# Altium PCB DAP-Link.PcbDoc
Units mil, origin at the board's own origin, x right, y up, seen from the top; angles counter-clockwise.
Board outline 1137.8 x 500 mil, 4 copper layers (Top Layer, Int1 (GND), Int2 (PWR), Bottom Layer), stack 62.449 mil thick; 37 components, 29 nets, 146 pads, 51 vias.
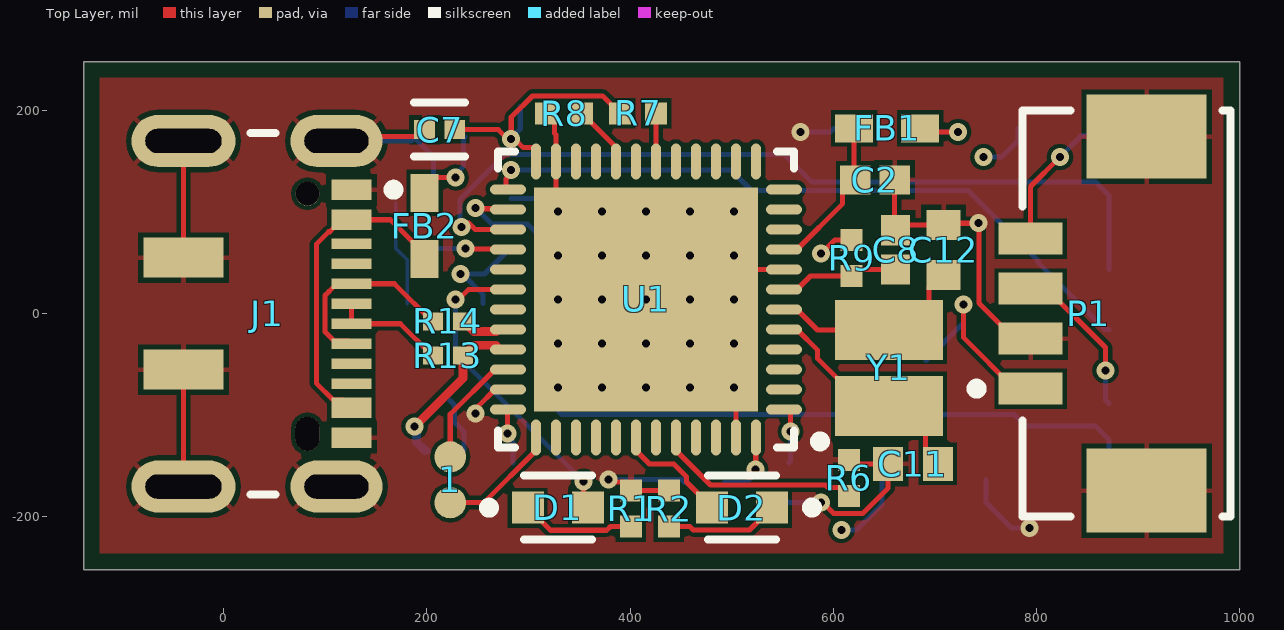
[diagram p0: Top Layer view]
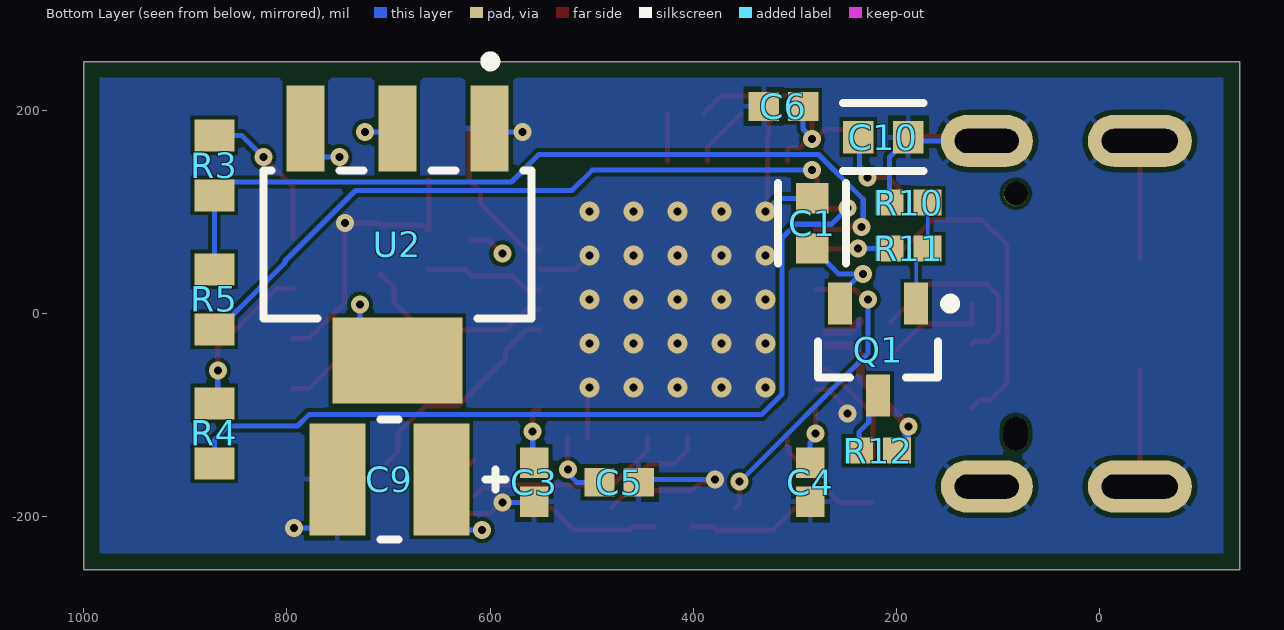
[diagram p1: Bottom Layer view, seen from below]
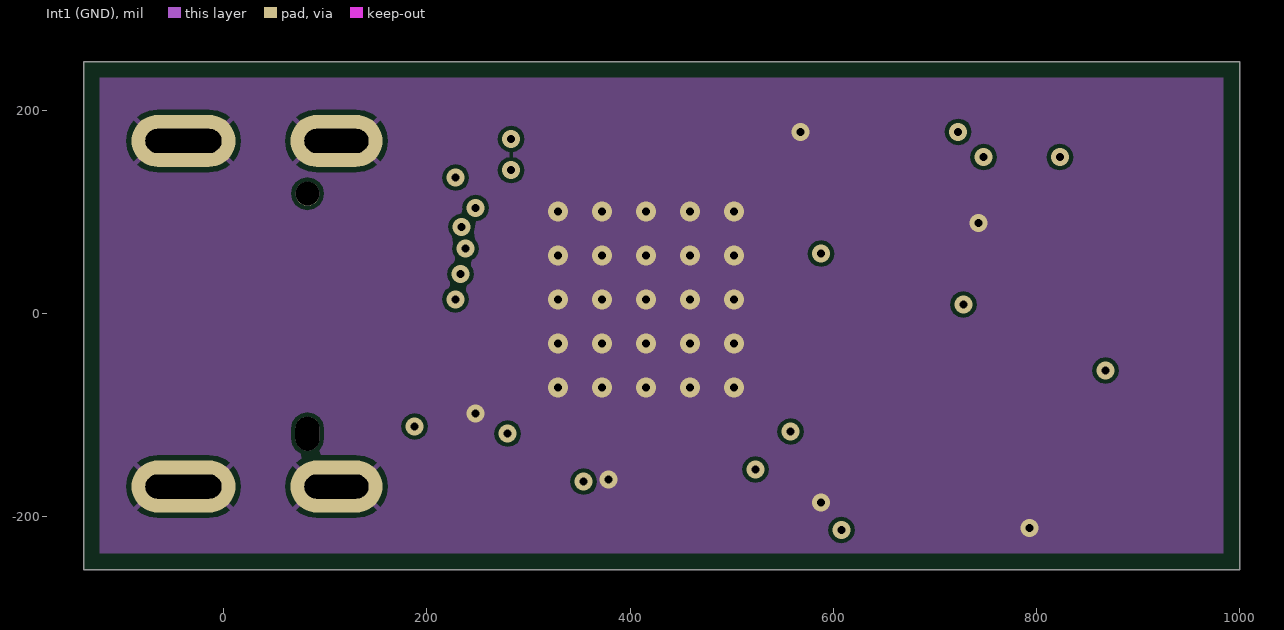
[diagram p2: Int1 (GND)]
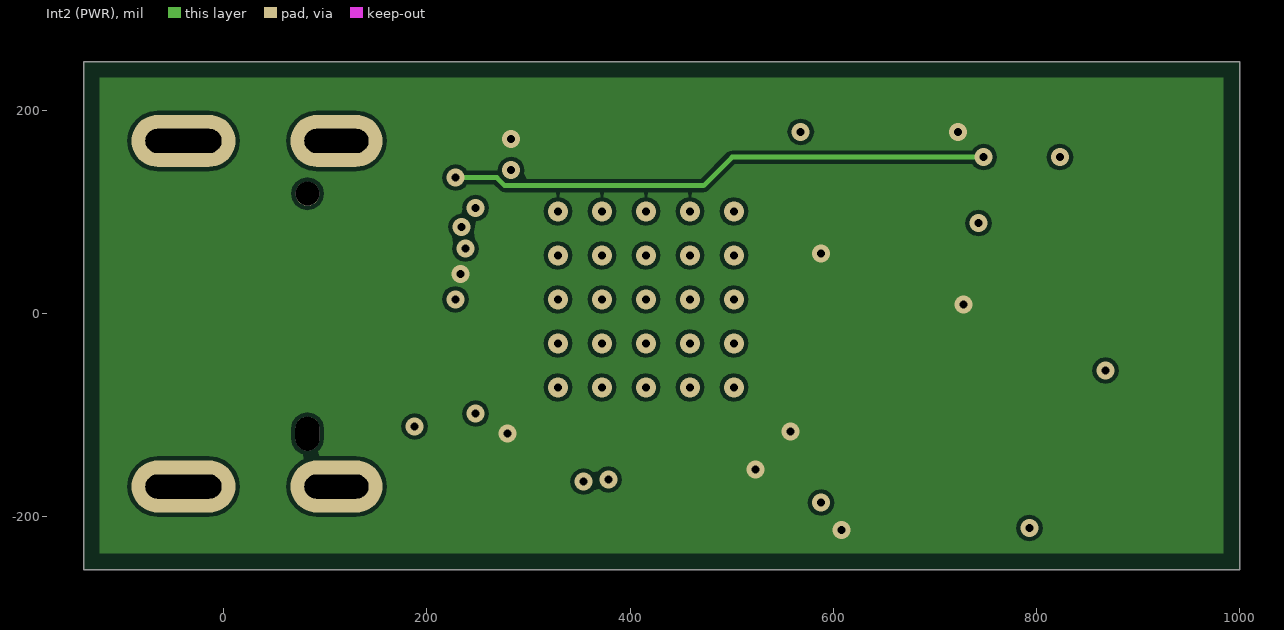
[diagram p3: Int2 (PWR)]

## Layer stack, top to bottom
Top Solder: solder mask 0.6, SM-001, Dk 3.8
Top Layer: signal copper 1.378
Dielectric 1: prepreg 8.284, PP-017, Dk 4.5
Int1 (GND): signal copper 0.598
Dielectric 2: core 41.929, Core-039, Dk 4.48
Int2 (PWR): signal copper 0.598
Dielectric 3: prepreg 8.284, PP-017, Dk 4.5
Bottom Layer: signal copper 1.378
Bottom Solder: solder mask 0.6, SM-001, Dk 3.8

## Board outline
-137.8,248.03 1000,248.03 1000,-251.97 -137.8,-251.97

## Design rules (kind name [scope] priority, off if disabled: settings)
BoardOutlineClearance [All] p1: gap=15.75 ignorepadtopadclearanceinfootprint=FALSE
Clearance [All] p1: gap=3.94 ignorepadtopadclearanceinfootprint=TRUE except(0: Arc-Text Track-Text SMDPad-Text THPad-Text Via-Text Fill-Text Poly-Text Region-Text Text-Text; 3.5: Arc-Arc Arc-Track Track-Track)
ComponentClearance [All] p1: gap=0 collisioncheckmode=3 verticalgap=10 showdistances=FALSE checkcomponentboundary=TRUE
DiffPairsRouting [All] p1: maxlimit=5 minlimit=5 mostfreqgap=5 toplayer_minwidth=8.56 toplayer_maxwidth=8.56 toplayer_prefwidth=8.56 midlayer1_minwidth=6.05 midlayer1_maxwidth=6.05 midlayer1_prefwidth=6.05 midlayer2_minwidth=6.05 midlayer2_maxwidth=6.05 midlayer2_prefwidth=6.05 bottomlayer_minwidth=8.56 bottomlayer_maxwidth=8.56 bottomlayer_prefwidth=8.56 impedanceprofiledriven=TRUE impedanceprofileid={6766D784-32F2-4273-9726-0A34E89F356C} impedanceprofilevalue=90.000000 maxuncoupledlength=500
HoleSize [All] p1: absolutevalues=TRUE maxlimit=248.03 minlimit=7.87 maxpercent=80.000 minpercent=20.000
MinimumAnnularRing [All] p1: minimumring=5.91
MinimumSolderMaskSliver [All] p1: minsoldermaskwidth=3.94
PlaneClearance [All] p1: clearance=5
PlaneConnect [All] p1: pad.planeconnectstyle=Relief pad.reliefexpansion=5 pad.reliefentries=4 pad.reliefconductorwidth=5 pad.reliefairgap=5 via.planeconnectstyle=Direct via.reliefexpansion=20 via.reliefentries=4 via.reliefconductorwidth=10 via.reliefairgap=10
PolygonConnect [All] p1: thpad.connectstyle=Relief thpad.reliefconductorwidth=5 thpad.reliefentries=4 thpad.polygonreliefangle="45 Angle" thpad.airgapwidth=5 smdpad.connectstyle=Relief smdpad.reliefconductorwidth=5 smdpad.reliefentries=4 smdpad.polygonreliefangle="90 Angle" smdpad.airgapwidth=5 via.connectstyle=Direct via.reliefconductorwidth=10 via.reliefentries=4 via.polygonreliefangle="90 Angle" via.airgapwidth=10
RoutingVias [All] p1: holewidth=7.87 width=17.72 viastyle="Through Hole" minholewidth=7.87 minwidth=17.72 maxholewidth=39.37 maxwidth=78.74
SilkToSilkClearance [All] p1: silktosilkclearance=5.91
SilkToSolderMaskClearance [IsPad] p1: minsilkscreentomaskgap=5.91 clearancetoexposedcopper=TRUE
SolderMaskExpansion [All] p1: expansion=4 istentingtop=FALSE
Width [All] p1: maxlimit=100 minlimit=3.5 preferedwidth=5 midlayer1_prefwidth=3.5 midlayer2_prefwidth=3.5 minimp=50.000000 maximp=50.000000 favimp=50.000000
22 further rules are at their usual default settings.

## Classes and differential pairs
differential pair USB: +USB_P -USB_N

## Components (designator, comment, footprint, x,y, rotation, side; value= is the part's Value field where it differs from the comment)
1 "Loader" Loader 223,-186 r90 top
C1 "10uF" FP-CL10-IPC_C 283,88.85 r270 bottom
C2 "100nF" CAPC1050X55X23ML05T13 641.05,131.66 r180 top
C3 "100nF" CAPC1050X55X23ML05T13 556.45,-166 r90 bottom
C4 "100nF" CAPC1050X55X23ML05T13 284.94,-166 r90 bottom
C5 "100nF" CAPC1050X55X23ML05T13 473,-166 r0 bottom
C6 "100nF" CAPC1050X55X23ML05T13 311.19,204 r180 bottom
C7 "1uF" FP-CL542-IPC_C 212.6,181.1 r180 top
C8 "100nF" CAPC1050X55X23ML05T13 661.32,62.75 r90 top
C9 "100UF 10% 6.3V" FP-TAJB-MFG 699.18,-163.14 r180 bottom
C10 "10uF" FP-CL10-IPC_C 213,173.74 r180 bottom
C11 "20pF" CAPC1608X90X30LL10T20 678.46,-147.9 r0 top
C12 "20pF" CAPC1608X90X30LL10T20 708.57,62.75 r270 top
D1 "LED GREEN" FP-LTST-C190GKT-MFG 329.03,-191 r0 top
D2 "LED BLUE" FP-LTST-C191TBKT-MFG 510.16,-190.81 r180 top
FB1 "600Ω@100MHz" MURA-BLM18-F-H1-CHIP-2_V 653,182.26 r180 top
FB2 "600Ω@100MHz" MURA-BLM18-F-H1-CHIP-2_V 197.69,86.52 r90 top
J1 "DX07S016JA1R1500" FP-DX07S016JA1R1500-MFG -0.16,-0.07 r270 top
P1 "53261-0471" MOLEX-53261-0471_V 851.31,0 r90 top
Q1 "PNP" INF-SOT23_N 218,-35.42 r270 bottom
R1 "10kΩ" RESC1005X40X25NL05T05 400.89,-191.8 r90 top
R2 "10kΩ" RESC1005X40X25NL05T05 438.3,-191.8 r90 top
R3 "100R" RESC1608X55X25ML10T15 871.43,145.9 r270 bottom
R4 "100R" RESC1608X55X25ML10T15 871.43,-117.9 r270 bottom
R5 "100R" RESC1608X55X25ML10T15 871.43,14 r90 bottom
R6 "10kΩ" RESC1005X40X25NL05T05 615.46,-161.68 r90 top
R7 "10kΩ" RESC1005X40X25NL05T05 408,197.08 r180 top
R8 "10kΩ" RESC1005X40X25NL05T05 335.16,197.08 r180 top
R9 "10kΩ" RESC1005X40X25NL05T05 618,54.88 r90 top
R10 "1K5" RESC1005X40X25ML05T10 188,109.29 r180 bottom
R11 "1K5" RESC1005X40X25ML05T10 188,64 r0 bottom
R12 "1K5" RESC1005X40X25ML05T10 218,-134.84 r0 bottom
R13 "22R" RESC1005X40X25LL05T10 220.75,-41 r0 top
R14 "22R" RESC1005X40X25LL05T10 220.75,-7.53 r0 top
U1 "" STM-UFQFPN48_N 415.64,14 r180 top
U2 "TLV1117-33IDCYR" FP-DCY0004A-MFG 691.3,68.17 r270 bottom
Y1 "8MHz" NDK-NX3225GD-8MHZ-STD-CRA-3_V 654.83,-53.4 r270 top

## Footprints (in the part's own frame and the unit in brackets; to place one, negate y for a bottom-side part, rotate by r counter-clockwise, add the part's x,y. Pads: shape width x height; smd on the part's side, far side on the other; paste and mask are expansions set on the pad)
CAPC1050X55X23ML05T13 [mm] "Chip Capacitor, 2-Leads, Body 1.05x0.55mm, IPC Low Density"
  rect 0.76x0.72 smd: 1(-0.49,0) 2(0.49,0)
  body extent -0.53,-0.28 0.53,0.27, height 0.55
CAPC1608X90X30LL10T20 [mm] "Chip Capacitor, 2-Leads, Body 1.70x0.90mm, IPC High Density"
  rect 0.75x0.85 smd: 1(-0.625,0) 2(0.625,0)
  body extent -0.85,-0.45 0.85,0.45, height 0.9
FP-CL10-IPC_C [mil]
  rect 29.85x31.97 smd paste+0 mask+0: 1(-24.68,0) 2(24.68,0)
  silkscreen extent -40,-33 40,33, body extent -31,-16 31,16, height 36
FP-CL542-IPC_C [mil]
  rect 20.29x18.6 smd paste+0 mask+0: 1(-14.9,0) 2(14.9,0)
  silkscreen extent -25,-27 25,27, body extent -29,-15 29,15, height 10
FP-DCY0004A-MFG [mm]
  rect 2.15x0.95 smd paste+0 mask+0: 1(-2.9,2.3) 2(-2.9,0) 3(-2.9,-2.3)
  rect 2.15x3.25 smd paste+0 mask+0: 4(2.9,0)
  silkscreen extent -4.7,-3.35 1.85,3.35, body extent -3.5,-3.25 3.5,3.25, height 1.8
FP-DX07S016JA1R1500-MFG [mm]
  rrect100% 1.3x2.3 hole 1.6 slot 0.6 at 0 deg paste-1000 mask+0: 1(-4.32,2.825) 2(4.32,2.825)
  rrect100% 1.3x2.6 hole 1.9 slot 0.6 at 0 deg paste-1000 mask+0: 3(-4.32,-1) 6(4.32,-1)
  rect 1x2 smd paste+0 mask+0: 4(-1.4,-1) 5(1.4,-1)
  rect 0.52x1 smd paste+0 mask+0: A1/B12(-3.1,3.2) A4/B9(-2.35,3.2) A12/B1(3.1,3.2) B4/A9(2.35,3.2)
  rect 0.27x1 smd paste+0 mask+0: A5(-1.75,3.2) A6(-0.25,3.2) A7(0.75,3.2) A8(1.75,3.2) B5(1.25,3.2) B6(0.25,3.2) B7(-0.75,3.2) B8(-1.25,3.2)
  round 0.6 hole 0.6 unplated paste-1000 mask+0: ""(-3,2.1)
  rrect100% 0.85x0.6 hole 0.6 slot 0.85 at 0 deg unplated paste-1000 mask+0: ""(3,2.1)
  silkscreen extent -4.52,0.67 4.52,4.38, body extent -5.07,-3.75 5.07,4.08, height 0.25
FP-LTST-C190GKT-MFG [mm]
  rect 0.8x0.8 smd paste+0 mask+0: 1(-0.75,0) 2(0.75,0)
  silkscreen extent -1.85,-0.8 0.85,0.8, body extent -1.25,-0.55 1.25,0.55, height 0.25
FP-LTST-C191TBKT-MFG [mm]
  rect 0.8x0.8 smd paste+0 mask+0: 1(-0.75,0) 2(0.75,0)
  silkscreen extent -1.88,-0.8 0.85,0.8, body extent -1.25,-0.55 1.25,0.55, height 0.25
FP-TAJB-MFG [mm]
  rect 1.4x2.8 smd paste+0 mask+0: 1(-1.3,0) 2(1.3,0)
  silkscreen extent -0.23,-1.5 2.9,1.5, body extent -1.75,-1.4 1.75,1.4, height 2.1
INF-SOT23_N [mm] "SOT23, 3-Leads, Body 2.9x1.3 mm, Pitch 0.95 mm, IPC Medium Density"
  rect 1.05x0.6 smd: 1(-1.15,0.95) 2(-1.15,-0.95) 3(1.15,0)
  silkscreen extent -1.27,-1.5 0.7,1.92, body extent -0.7,-1.5 0.7,1.5, height 1.1
Loader [mil]
  round 30.98 smd: 1(0,0) 2(45,0)
MOLEX-53261-0471_V [mm] "SMD, 4-Leads, Body 10.15x5.2mm, Pitch 1.25mm"
  rect 0.8x1.6 smd: 1(-1.875,1.45) 2(-0.625,1.45) 3(0.625,1.45) 4(1.875,1.45)
  rect 2.1x3 smd: MP1(-4.425,-1.45) MP2(4.425,-1.45)
  silkscreen extent -5.08,-3.55 5.08,2.92, body extent -5.08,-3.55 5.07,1.65, height 3.4
MURA-BLM18-F-H1-CHIP-2_V [mm] "Chip Ferrite Bead, 2-Leads, Body 1.6x0.8mm, Height 0.95mm, Flow"
  rect 0.95x0.7 smd: 1(-0.825,0) 2(0.825,0)
  body extent -0.8,-0.4 0.8,0.4, height 0.95
NDK-NX3225GD-8MHZ-STD-CRA-3_V [mm] "SMD, 2-Leads, Body 3.2x2.5mm"
  rect 1.5x2.7 smd: 1(-0.95,0) 2(0.95,0)
  body extent -1.6,-1.25 1.6,1.25, height 1
RESC1005X40X25LL05T10 [mm] "Chip Resistor, 2-Leads, Body 1.00x0.50mm, IPC High Density"
  rect 0.5x0.45 smd: 1(-0.375,0) 2(0.375,0)
  body extent -0.53,-0.27 0.53,0.28, height 0.4
RESC1005X40X25ML05T10 [mm] "Chip Resistor, 2-Leads, Body 1.00x0.50mm, IPC Low Density"
  rect 0.7x0.65 smd: 1(-0.475,0) 2(0.475,0)
  body extent -0.53,-0.27 0.53,0.28, height 0.4
RESC1005X40X25NL05T05 [mm] "Chip Resistor, 2-Leads, Body 1.00x0.50mm, IPC Medium Density"
  rect 0.55x0.55 smd: 1(-0.45,0) 2(0.45,0)
  body extent -0.53,-0.27 0.53,0.28, height 0.4
RESC1608X55X25ML10T15 [mm] "Chip Resistor, 2-Leads, Body 1.60x0.80mm, IPC Low Density"
  rect 0.8x1 smd: 1(-0.75,0) 2(0.75,0)
  body extent -0.85,-0.45 0.85,0.45, height 0.55
STM-UFQFPN48_N [mm] "QFN, 48-Leads, Body 7.1x7.1mm, Pitch 0.5mm, Thermal Pad 5.6x5.6mm, IPC Medium Density"
  oval 0.9x0.25 smd: 1(-3.45,2.75) 2(-3.45,2.25) 3(-3.45,1.75) 4(-3.45,1.25) 5(-3.45,0.75) 6(-3.45,0.25) 7(-3.45,-0.25) 8(-3.45,-0.75) 9(-3.45,-1.25) 10(-3.45,-1.75) 11(-3.45,-2.25) 12(-3.45,-2.75) 25(3.45,-2.75) 26(3.45,-2.25) 27(3.45,-1.75) 28(3.45,-1.25) 29(3.45,-0.75) 30(3.45,-0.25) 31(3.45,0.25) 32(3.45,0.75) 33(3.45,1.25) 34(3.45,1.75) 35(3.45,2.25) 36(3.45,2.75)
  oval 0.25x0.9 smd: 13(-2.75,-3.45) 14(-2.25,-3.45) 15(-1.75,-3.45) 16(-1.25,-3.45) 17(-0.75,-3.45) 18(-0.25,-3.45) 19(0.25,-3.45) 20(0.75,-3.45) 21(1.25,-3.45) 22(1.75,-3.45) 23(2.25,-3.45) 24(2.75,-3.45) 37(2.75,3.45) 38(2.25,3.45) 39(1.75,3.45) 40(1.25,3.45) 41(0.75,3.45) 42(0.25,3.45) 43(-0.25,3.45) 44(-0.75,3.45) 45(-1.25,3.45) 46(-1.75,3.45) 47(-2.25,3.45) 48(-2.75,3.45)
  rect 5.6x5.6 smd: 49(0,0)
  silkscreen extent -4.48,-3.7 3.7,3.7, body extent -3.55,-3.55 3.55,3.55, height 0.6

## Part data
C1 C10: library part CMP-13271-004224-1, "Cap Ceramic 10uF 25V X5R ±20% Pad SMD 0603 +85°C T/R", Case Code (Imperial)=0603, Case Code (Metric)=1608, Dielectric=X5R, Max Operating Temperature=85°C, Min Operating Temperature=-55°C, Package Quantity=1, Tolerance=20%, Voltage Rating=25V, Capacitance=10uF, Case/Package=0603, Contact Plating=Tin, Lead Free="Lead Free", Length=0.063inch, Mount="Surface Mount", Packaging="Tape and Reel", Termination=Wraparound, Thickness=0.035inch, Width=0.031inch
C2 C3 C4 C5 C6 C8: library part CMP-2000-05439-1, "Chip Capacitor, 100 nF, +/- 10%, 16 V, -55 to 125 degC, 0402 (1005 Metric), RoHS, Tape and Reel", Capacitance=100000pF, Case Size/Dimension=0402, Dielectric=X7R, Manufacturer="Samsung Electro-Mechanics", Rated Voltage=16V, Tolerance (%)=±10%, Datasheet URL=https://datasheet.ciiva.com/29198/458718-da-01-en-vs-kondensator-0402-29198423.pdf, Datasheet Version=Nov-10, Manufacturer URL=http://www.samsungsem.com/global/index.jsp
C7: library part CMP-13271-001051-1, "Cap Ceramic 1uF 25V X5R ±10% SMD 0402 +85°C Paper T/R", Case Code (Imperial)=0402, Case Code (Metric)=1005, Dielectric=X5R, Max Operating Temperature=85°C, Min Operating Temperature=-55°C, Package Quantity=10000, Tolerance=10%, Voltage Rating=25V, Capacitance=1uF, Case/Package=0402, Depth=0.5mm, Height=0.5mm, Lead Free="Lead Free", Length=1mm, Material=Ceramic, Mount="Surface Mount", Packaging="Tape and Reel", Radiation Hardening=No, Thickness=0.022inch, Width=0.02inch
C9: library part CMP-04424-000366-1, "100uF 6.3V  ±10% 1.7Ω 1210  SMD Tantalum Capacitor", Capacitance=100uF, Case Code (Imperial)=1210, Case Code (Metric)=3528, Dielectric Material=Tantalum, ESR (Equivalent Series Resistance)=1.7R, Leakage Current=6.3uA, Max Operating Temperature=125°C, Min Operating Temperature=-55°C, Package Quantity=1, Tolerance=10%, Voltage=6.3V, Case/Package=1210, Construction=Flat, Depth=2.8mm, Dissipation Factor=10%, Features="General Purpose", Height=1.9mm, Height - Seated (Max)=0.083inch, Lead Free="Lead Free", Length=3.5mm, Mount="Surface Mount", Packaging="Tape and Reel", Polarity=Polar, Radiation Hardening=No, REACH SVHC="No SVHC", RoHS Compliant=Yes, Series=TAJ, Termination=SMD/SMT, Voltage Rating=6.3V, Voltage Rating (DC)=6.3V, Width=2.8mm
C11 C12: library part CMP-2000-06100-1, "Chip Capacitor, 20 pF, +/- 5%, 50 V, -55 to 85 degC, 0603 (1608 Metric), RoHS, Tape and Reel", Case Size/Dimension=0603, Dielectric=C0G, Manufacturer="Samsung Electro-Mechanics", Package Description="2-Pin Surface Mount Device, Body 1.60 x 0.80 mm", Rated Voltage=50V, Tolerance (%)=±5%, Capacitance=20pF, Datasheet URL=http://www.samsungsem.com/kr/support/product-search/mlcc/__icsFiles/afieldfile/2016/08/18/S_CL10C200JB8NNNC.pdf, Datasheet Version=06/2016, Manufacturer URL=http://www.samsungsem.com/global/index.jsp, Mounting Technology=SurfaceMount, Package Reference=0603
D1: library part CMP-22017-000005-1, "LED GREEN CLEAR CHIP SMD", Case Code (Imperial)=0603, Case Code (Metric)=1608, Color=Green, Forward Current=30mA, Forward Voltage=2.1V, Lens Color=Colorless, Max Operating Temperature=85°C, Min Operating Temperature=-55°C, Package Quantity=1, Power Dissipation=100mW, Reverse Voltage=5V, Test Current=10mA, Voltage=2V, Case/Package=0603, Depth=0.8mm, Dominant Wavelength=569nm, Height=0.8mm, Illumination Color=Green, Lead Free="Lead Free", Length=1.6mm, Lens Style=Clear, Lens Transparency=Clear, Luminous Intensity=6mcd, Mount="Surface Mount", Number of Elements=1, Number of LEDs=1, Number of Pins=2, Packaging="Tape and Reel", Power Rating=100mW, Radiation Hardening=No, Viewing Angle=130°, Wavelength=565nm, Width=0.8mm
D2: library part CMP-22017-000008-1, "LED BLUE CLEAR CHIP SMD", Case Code (Imperial)=0603, Case Code (Metric)=1608, Color=Blue, Forward Current=20mA, Forward Voltage=3.8V, Lens Color=Colorless, Max Operating Temperature=80°C, Max Power Dissipation=75mW, Min Operating Temperature=-20°C, Package Quantity=1, Power Dissipation=76mW, Reverse Voltage=5V, Case/Package=0603, Depth=1.6mm, Dominant Wavelength=475nm, Height=0.55mm, Illumination Color=Blue, Lead Free="Lead Free", Length=0.8mm, Lens Style=Diffused, Lens Transparency=Clear, Luminous Intensity=180mcd, Mount="Surface Mount", Number of Elements=1, Number of LEDs=1, Number of Pins=2, Packaging="Tape and Reel", Radiation Hardening=No, Test Current=20mA, Viewing Angle=130°, Wavelength=468nm, Width=0.8mm
FB1 FB2: library part CMP-0686-00436-2, "Chip Ferrite Bead for General Use, 600 Ohm, 500 mA, -55 to 125 degC, 1.6 x 0.8 x 0.95 mm SMD, Tape and Reel", DC Resistance="0.38 Ohm Max.", Manufacturer=Murata, Operating Temperature Range="-55 to 125 degC", PartNumber=BLM18AG601SN1D, Rated Current="500 mA", ComponentLink1Description="Manufacturer URL", ComponentLink1URL=http://www.murata.com/, ComponentLink2Description=Datasheet, ComponentLink2URL=http://www.murata.com/products/catalog/pdf/c31e.pdf, ComponentLink3Description="Package Specification", ComponentLink3URL=http://www.murata.com/products/catalog/pdf/c31e.pdf, DatasheetVersion=08/2013, Impedance (at 100 MHz)="600 Ohm +/- 25%", Mounting Technology="Surface Mount", PackageDescription="2-Pin Chip, Body 1.6 x 0.8 mm", PackageReference=BLM18_H950-2, Packing="Tape and Reel"
J1: library part CMP-19038-000003-1, "CONN RCP USB2.0 TYP C 24P SMD RA"
P1: library part CMP-2000-05238-1, "Male Header, Pitch 1.25 mm, 1 x 4 Position, Height 3.4 mm, -40 to 85 degC, RoHS, Tape and Reel", Current Rating=1A, Manufacturer=Molex, Package Description="1.25mm Pitch PicoBlade(TM) Header, Surface Mount, Right Angle, Lead-Free, 4 Circuits", Voltage Rating=125V, Brand=Molex, Contact Material=PhosphorBronze, Contact Plating=Tin, Datasheet URL=http://www.molex.com/pdm_docs/sd/532610471_sd.pdf, Datasheet Version="Rev. G, 01/2012", Factory Pack Quantity=1000, Housing Material=Thermoplastic, Manufacturer URL=http://www.molex.com/, Mounting Angle=Right, Mounting Style=SMD/SMT, Number of Positions=4, Number of Positions / Contacts=4, Number of Rows=1, Packaging=Reel, Pitch=1.25mm, Product Category=Headers&WireHousings, Product Type=Headers, RoHS=Details, Series=53261, Termination Style=SMD, Tradename=PicoBlade, Type=Shrouded
Q1: library part CMP-1178-00006-1, "PNP Silicon Switching Transistor, 40 V VCEO, 200 mA IC, SOT23, Reel, Green", Manufacturer=Infineon, PartNumber=SMBT3906, ComponentLink1Description="Manufacturer URL", ComponentLink1URL=http://www.infineon.com/, ComponentLink2Description=Datasheet, ComponentLink2URL=http://www.infineon.com/dgdl/smbt3906_mmbt3906series.pdf?folderId=db3a30431441fb5d011445fab851018e&fileId=db3a30431441fb5d01144604610f0192, ComponentLink3Description="Package Specification", ComponentLink3URL=http://www.infineon.com/dgdl/SOT23-Package_Overview.pdf?folderId=db3a30431936bc4b0119532290053c66&fileId=db3a30431936bc4b0119533468123c85, Green=TRUE, IC="10 mA", IC (max)="200 mA", ICBO (max)="50 nA", Mounting Technology="Surface Mount", PackageDescription="3-Pin Small Outline Transistor Package, 1.3 x 2.9 mm Body, 0.95 mm Pitch", PackageReference=SOT23, PackageVersion=Apr-08, Packing=Reel, Polarity=PNP, VCBO (max)="40 V", VCE="1 V", VCE (max)="1 V", VCEO (max)="40 V", VEBO (max)="6 V"
R1 R2 R6 R7 R8 R9: library part CMP-2002-08135-1, Manufacturer="Vishay Dale", Part Number=CRCW040210K0FKED
R3 R4 R5: library part CMP-2100-03663-1, "Chip Resistor, 100 Ohm, +/- 1%, 0.1 W, -55 to 155 degC, 0603 (1608 Metric), RoHS, Tape and Reel", Case Code (Imperial)=0603, Case Code (Metric)=1608, Manufacturer=Yageo, Max Operating Temperature=155degC, Min Operating Temperature=-55degC, Package Description="2-Pin Surface Mount Device, Body 1.6 x 0.8 mm", Power Rating=100mW, Resistance=100Ohm, Temperature Coefficient=100ppm/degreesC, Tolerance=1%, Voltage Rating=50V, Case/Package=0603, Composition=ThickFilm, Datasheet URL=http://www.yageo.com/NewPortal/yageodocoutput?fileName=/pdf/R-Chip/PYu-RC_Group_51_RoHS_L_5.pdf, Datasheet Version="Rev. 5, 10/2016", Depth=0.8mm, Height=0.45mm, Lead Free=LeadFree, Length=1.6mm, Manufacturer URL=http://www.yageo.com/, Military Standard=Not, Number of Pins=2, Package Reference=0603, Packaging=TapeandReel, REACH SVHC=Unknown, RoHSCompliant=true, Termination=SMD/SMT, Voltage Rating (DC)=50V, Width=0.8mm
R10 R11 R12: library part CMP-2002-07464-1, Manufacturer="Yageo / Phycomp", Part Number=RC0402FR-071K5L
R13 R14: library part CMP-2002-07520-1, Manufacturer="Yageo / Phycomp", Part Number=RC0402FR-0722RL
U1: library part CMP-0237-00051-3, "ARM Cortex-M3 32-bit MCU, 128 KB Flash, 20 KB Internal RAM, 37 I/Os, 48-pin UFQFPN, -40 to 85 degC, Tray", I/Os (High Current)=37, Operating Frequency(F) (Processor speed) (MHz)=72, PartNumber=STM32F103CBU6, Supply Voltage(Vcc) min (V)=2, A/D Converter="2x12-bit (10 Channel)", ComponentLink1Description="Manufacturer URL", ComponentLink1URL=http://www.st.com/web/en/home.html, ComponentLink2Description=Datasheet, ComponentLink2URL=http://www.st.com/st-web-ui/static/active/en/resource/technical/document/datasheet/CD00161566.pdf, ComponentLink3Description="Package Specification", ComponentLink3URL=http://www.st.com/st-web-ui/static/active/en/resource/technical/document/data_brief/DM00071938.pdf, Core="ARM Cortex-M3", DatasheetVersion="Rev. 16", FLASH Size (Prog) (kB)=128, Internal RAM Size (kB)=20, Mounting Technology="Surface Mount", PackageDescription="48-Pin Ultra Thin Fine Pitch Quad Flat No-Lead, 7 x 7 x 0.6 mm Body, 0.5 mm Pitch, Exposed Pad", PackageReference=UFQFPN48, PackageVersion="Rev. 1, 04/2013", Packing=Tray
U2: library part CMP-04917-000056-1, "IC REG LIN 3.3V 800MA SOT223-4", Dropout Voltage=1.2V, Manufacturer="Texas Instruments", Max Junction Temp=+125°C, Max Supply Voltage=15V, Min Supply Voltage=4.7V, Nominal Supply Current=5mA, Output Current=0.8A, Output Voltage=3.3V, Package=DCY0004A, Temperature="-40°C to +125°C", Temperature Range Low=-40°C, Automotive=No, Category=IC, ComponentLink2Description=Datasheet, ComponentLink2URL=http://www.ti.com/lit/ds/symlink/tlv1117.pdf, Device Class L1="Integrated Circuits (ICs)", Device Class L2="Power Management ICs", Device Class L3="Voltage Regulators - Linear", Digikey Description="IC REG LIN 3.3V 800MA SOT223-4", Height=1.8mm, Lead Free=Yes, Manufacturer Part Number=TLV1117-33IDCYR, Mouser Description="LDO Voltage Regulators Fixed LDO Volt Reg", Number Of Outputs=1, Octopart=https://octopart.com/tlv1117-33idcyr-texas+instruments-669250, Output Type=Fixed, RoHS=TRUE, Standoff Height=0.02mm, Temperature Range High=+125°C
Y1: library part CMP-2000-07595-1, "Crystal Unit, 8 MHz, 8 pF, -40 to 150 degC, 2-Pin SMD, RoHS, Tape and Reel", Case/Package=SMD/SMT, ESR (Equivalent Series Resistance)=500Ohm, Frequency Stability=150ppm, Frequency Tolerance=50ppm, Load Capacitance=8pF, Manufacturer=NDK, Max Operating Temperature=150degC, Min Operating Temperature=-40degC, Package Description="2-Pin Surface Mount Device, Body 3.2 x 2.5 mm", Package Quantity=3000, Package Reference=NX3225GD-8MHZ-STD-CRA-3, Datasheet URL=http://www.ndk.com/images/products/catalog/c_NX3225GD-STD-CRA-3_e.pdf, Datasheet Version=11/2016, Frequency=8MHz, Height=0.039inch, Length=0.126inch, Manufacturer URL=http://www.ndk.com/en/, Mount=SurfaceMount, Mounting Technology=SurfaceMount, Number of Pins=2, Packaging=TapeandReel, RoHSCompliant=True, Width=0.098inch

## Via types
v1: diameter 17.72, hole 7.87, Top Layer to Bottom Layer, tented both sides, 26 vias
v2: diameter 19.68, hole 7.87, Top Layer to Bottom Layer, 25 vias

## Nets (pads, with @x,y where several pads share a name; then routed paths per layer and width w, separated by ;. In a path a pad name is that pad's centre, name@x,y a point inside that pad or via, vN(x,y) a via of type N, cw(c..) or ccw(c..) an arc to the next point about the centre after c; other vN are vias at no path point)
3V3: C1.2 C3.2 C4.2 C5.2 C6.2 C7.1 C9.2 FB1.1 P1.1 Q1.2 R7.2 R9.2 U1.1 U1.24 U1.36 U1.48 U2.2 U2.4 | length 933.7
  Top Layer w5: C7.1 270.34,181.1 279.61,171.84 v1(283.05,171.84) ; v1(279.53,-118.11) 279.53,-94.56 U1.36 ; U1.24 307.38,161.14 305.14,163.37 294.96,163.37 286.49,171.84 v1(283.05,171.84) ; R7.2 373.02,214.34 303.95,214.34 283.05,193.45 v1(283.05,171.84) ; v1(523.46,-153.33) 523.68,-153.1 523.68,-122.05 U1.48 ; U1.1 555.76,-94.27 558,-96.5 v1(558,-116) ; v1(588,59) 601.59,72.59 R9.2 ; FB1.1 688.74,179 v1(723,179) ; v1(728,9) 728,-23.34 778.48,-73.82 P1.1
  Bottom Layer w5: v1(233,39) v1@235.12,39 ; Q1.2 255.4,18.71 v1@235.12,39 ; v1(279.53,-118.11) 279.53,-121.5 284.94,-126.91 C4.2 ; C1.2 281.94,64.16 256.78,39 v1@235.12,39 ; v1(283.05,171.84) 283.05,173.01 291.9,181.86 C6.2 ; C5.2 514.56,-166 521.02,-159.54 521.02,-155.77 v1(523.46,-153.33) ; C3.2 558,-145.16 v1(558,-116) ; v1(608,-212.98) 622.94,-212.98 648,-187.92 C9.2 ; U2.4 728,-9.3 v1(728,9) ; U2.2 694.64,179 v1(723,179)
3V3A: C2.2 FB1.2 U1.9 | length 155.5
  Top Layer w5: U1.9 564.27,63.21 609.3,108.24 609.3,119.98 620.97,131.66 620.52,132.11 FB1.2
BOOT0: R6.1 U1.44 | length 201.6
  Top Layer w5: U1.44 445.17,-134.62 479.18,-168.63 592.26,-168.63 594.7,-171.07 607.13,-171.07 R6.1
BOOT1: R8.1 U1.20 | length 61
  Top Layer w5: R8.1 386.12,163.84 U1.20
GND: C1.1 C2.1 C3.1 C4.1 C5.1 C6.1 C7.2 C8.2 C9.1 C10.2 C11.1 C12.1 J1.1 J1.2 J1.3 J1.4 J1.5 J1.6 J1.A1/B12 J1.A12/B1 P1.2 P1.MP1 P1.MP2 R1.2 R2.2 R6.2 R8.2 R10.1 U1.8 U1.23 U1.35 U1.47 U1.49 U2.1 | length 1479.2
  Top Layer w5: J1.6 J1.5 ; J1.4 J1.3 ; J1.1 115.35,174.3 190.89,174.3 C7.2 ; v1(248.03,-98.43) 250.46,-95.99 250.46,-91.14 267.02,-74.58 U1.35 ; R8.2 325.77,188.75 325.77,177.45 327.06,176.16 U1.23 327.06,102.58 v2(329.03,100.61) ; v1(378.73,-163.25) 382.17,-163.25 384.68,-165.75 392.56,-165.75 R1.2 R2.2 ; v2(502.26,-72.61) 504.23,-74.58 U1.47 ; v2(502.26,57.31) 516.04,43.53 U1.8 ; v1(588,-186) 589.81,-186 600.47,-196.66 628.95,-196.66 653.85,-171.76 C11.1 619.4,-147.9 R6.2 ; C2.1 660.34,83.02 C8.2 666.63,87.36 C12.1 710.21,89 v1(743,89) 743.3,88.7 743.3,10.57 778.48,-24.61 P1.2
  Bottom Layer w5: J1.1 184.59,170.01 C10.2 188.32,172.68 206.7,154.29 R10.1 ; C1.1 316.11,113.53 v2(329.03,100.61) ; v1(378.73,-163.25) 450.95,-163.25 C5.1 ; C3.1 557.16,-186 v1(588,-186) ; v1(568,179) 597.4,179 U2.1 ; C9.1 750.36,-185.94 775.42,-211 v1(793,-211)
  other v2: 329.03,-72.61 372.34,-72.61 415.64,-72.61 458.95,-72.61 329.03,-29.31 372.34,-29.31 415.64,-29.31 458.95,-29.31 502.26,-29.31 329.03,14 372.34,14 415.64,14 458.95,14 502.26,14 329.03,57.31 372.34,57.31 415.64,57.31 458.95,57.31 372.34,100.61 415.64,100.61 458.95,100.61 502.26,100.61
LED_CON: D2.2 U1.42 | length 113.9
  Top Layer w5: U1.42 405.8,-134.62 419.25,-148.07 443.05,-148.07 455.57,-160.59 455.57,-165.74 D2.2
LED_CON_GND: D2.1 R2.1 | length 112
  Top Layer w5: R2.1 458.74,-209.51 462.22,-213 517.51,-213 D2.1
LED_RUN: D1.2 U1.30 | length 315.1
  Top Layer w5: v1(228,14.13) 231.44,14.13 241.23,23.92 279.74,23.92 U1.30 ; v1(354.33,-165.35) 354.33,-186.77 D1.2
  Bottom Layer w5: v1(228,14.13) 228,-39.02 v1(354.33,-165.35)
LED_RUN_GND: D1.1 R1.1 | length 112.1
  Top Layer w5: D1.1 321.69,-213.19 376.97,-213.19 380.64,-209.51 R1.1
N_RST: C8.1 R9.1 U1.7 | length 118
  Top Layer w5: U1.7 564.27,23.84 577.58,37.16 R9.1 624.3,43.46 C8.1
NetQ1_1: Q1.1 R10.2 R11.1 | length 104.3
  Bottom Layer w3.5: R10.2 R11.1 169.55,64 180.6,52.95 Q1.1
NetQ1_3: Q1.3 R12.2 | length 61.9
  Bottom Layer w5: Q1.3 227.31,-90.01 227.31,-106.94 236.7,-116.33 R12.2
nRST: R7.1 U1.18 | length 47.3
  Top Layer w5: U1.18 425.49,196.85 R7.1
OSC_IN: C11.2 U1.5 Y1.2 | length 221.7
  Top Layer w5: U1.5 564.27,-15.53 584.69,-35.95 584.69,-44.28 631.21,-90.8 Y1.2 663.77,-90.8 690.8,-117.83 690.8,-135.64 C11.2
OSC_OUT: C12.2 U1.6 Y1.1 | length 196.6
  Top Layer w5: U1.6 564.27,4.16 584.42,-16 Y1.1 667.31,-16 694.34,11.03 694.34,25.88 706.6,38.14 C12.2
SWCLK: 1.1 U1.37 | length 118.5
  Top Layer w5: 1.1 256,-186 307.38,-134.62 U1.37
SWDIO: 1.2 U1.34 | length 117.1
  Top Layer w5: 1.2 223,-98.92 267.02,-54.9 U1.34
TCK_SWCLK: R4.2 U1.26 | length 863.7
  Top Layer w5: v1(248,104) 248.71,103.29 279.11,103.29 U1.26
  Bottom Layer w5: v1(248,104) 264,88 299.18,88 312.75,74.42 312.75,-79.36 332.79,-99.39 778.4,-99.39 789.56,-110.56 857.8,-110.56 871.43,-124.18 R4.2
TCK_SWCLK_CONN: P1.3 R4.1 | length 154.2
  Top Layer w5: P1.3 809.97,24.61 868,-33.42 v1(868,-56)
  Bottom Layer w5: v1(868,-56) 868,-84.95 R4.1
TMS_SWDIO: R3.2 R5.2 U1.27 | length 823.8
  Top Layer w5: v1(234.22,85.41) 237.66,85.41 241.25,89 241.44,89 247.54,82.9 U1.27
  Bottom Layer w5: v1(234.22,85.41) 232.7,86.92 232.7,112.58 276.66,156.54 551.99,156.54 578.91,129.62 858.18,129.62 R3.2 R5.2
TMS_SWDIO_CONN: P1.4 R3.1 | length 149.4
  Top Layer w5: P1.4 794.22,125.22 v1(823,154)
  Bottom Layer w5: v1(823,154) 844.43,175.43 R3.1
TMS_SWDIO_UP: R5.1 U1.25 | length 676.1
  Top Layer w5: U1.25 279.82,122.69 278,124.5 278,132.81 283,137.81 v1(283,141.25)
  Bottom Layer w5: v1(283,141.25) 499.41,141.25 519.54,121.12 732.51,121.12 801.79,51.84 801.79,50.17 867.49,-15.53 R5.1
USB_CONN_N: J1.A7 J1.B7 R14.1 | length 193.1
  Top Layer w5: 103.47,21.53 99.7,17.76 99.7,-17.89 108.59,-26.78 123.01,-26.78 J1.A7 ; 103.52,21.53 111.46,29.46 J1.B7 168.02,29.46 205,-7.53 R14.1
USB_CONN_P: J1.A6 J1.B6 R13.1 | length 112.7
  Top Layer w5: J1.A6 J1.B6 173.91,-9.91 205,-41 R13.1
USB_ENUM: R11.2 U1.28 | length 73.4
  Top Layer w5: v1(238,64) 238.39,63.61 279.42,63.61 U1.28
  Bottom Layer w5: R11.2 v1(238,64)
USB_N: R14.2 U1.32 | length 36.8
  Top Layer w8.56: R14.2 236.5,-7.53 241.08,-12.1 241.08,-12.46 246.09,-17.48 U1.32@268,-17.48
USB_P: R12.1 R13.2 U1.33 | length 155.6
  Top Layer w8.56: v1(188,-111) 235.52,-63.48 R13.2 236.5,-41 241.08,-36.42 241.08,-36.06 246.09,-31.05 U1.33@268,-31.05
  Bottom Layer w8.56: v1(188,-111) 188,-113.48 189.8,-115.28 189.8,-126.33 198.31,-134.84 R12.1
VCC: C10.1 FB2.2 U2.3 | length 670.7
  Top Layer w5: FB2.2 197.69,123.92 207.62,133.86 v1(228.35,133.86)
  Int2 (PWR) w5: v1(228.35,133.86) 268.76,133.86 276.66,125.95 472.45,125.95 500.5,154 v1(748,154)
  Bottom Layer w5: v1(228.35,133.86) 228.35,137.3 236.22,145.17 236.22,172.28 C10.1 ; v1(748,154) 765.65,154 781.85,170.2 U2.3
VCC_FB: FB2.1 J1.A4/B9 J1.B4/A9 | length 316.7
  Top Layer w5: J1.B4/A9 118.09,-84.85 107.61,-84.85 91.2,-68.44 91.2,68.31 103.47,80.58 104.51,80.58 116.38,92.45 J1.A4/B9 164.19,92.45 197.69,58.96 FB2.1
pads on no net: J1. J1.A5 J1.A8 J1.B5 J1.B8 U1.2 U1.3 U1.4 U1.10 U1.11 U1.12 U1.13 U1.14 U1.15 U1.16 U1.17 U1.19 U1.21 U1.22 U1.29 U1.31 U1.38 U1.39 U1.40 U1.41 U1.43 U1.45 U1.46

## Polygon pours and split planes (outlines as drawn)
GND on Top Layer "GND_L01_P002" (solid, pour order 2): -2032,-1591 3968,-1591 3968,2409 -2032,2409
GND on Bottom Layer "GND_L04_P003" (solid, pour order 3): -2032,-1591 3968,-1591 3968,2409 -2032,2409
3V3 on Int2 (PWR) "3V3_L03_P001" (solid, pour order 1): -2032,-1591 3968,-1591 3968,2409 -2032,2409
GND on Int1 (GND) "GND_L02_P000" (solid, pour order 0): -2032,-1591 3968,-1591 3968,2409 -2032,2409

## Silkscreen, mask and mechanical layers (free items; w line width, h text height)
Mechanical 1:
  the board outline again, w10

## Text inside footprints (layer, text, board x,y; h text height)
FB1: Mechanical 6 "Land Pattern Adapted for Flow Soldering" at 692.37,158.64 h1.97 r180
FB2: Mechanical 6 "Land Pattern Adapted for Flow Soldering" at 221.31,47.15 h1.97 r270